# Altium PCB SHR_T.PcbDoc
Units mm, origin at the board's own origin, x right, y up, seen from the top; angles counter-clockwise.
Board outline 80.41 x 22.74 mm, 4 copper layers (Top Layer, GND, VCC, Bottom Layer), stack 0.755 mm thick; 50 components, 32 nets, 202 pads, 43 vias.
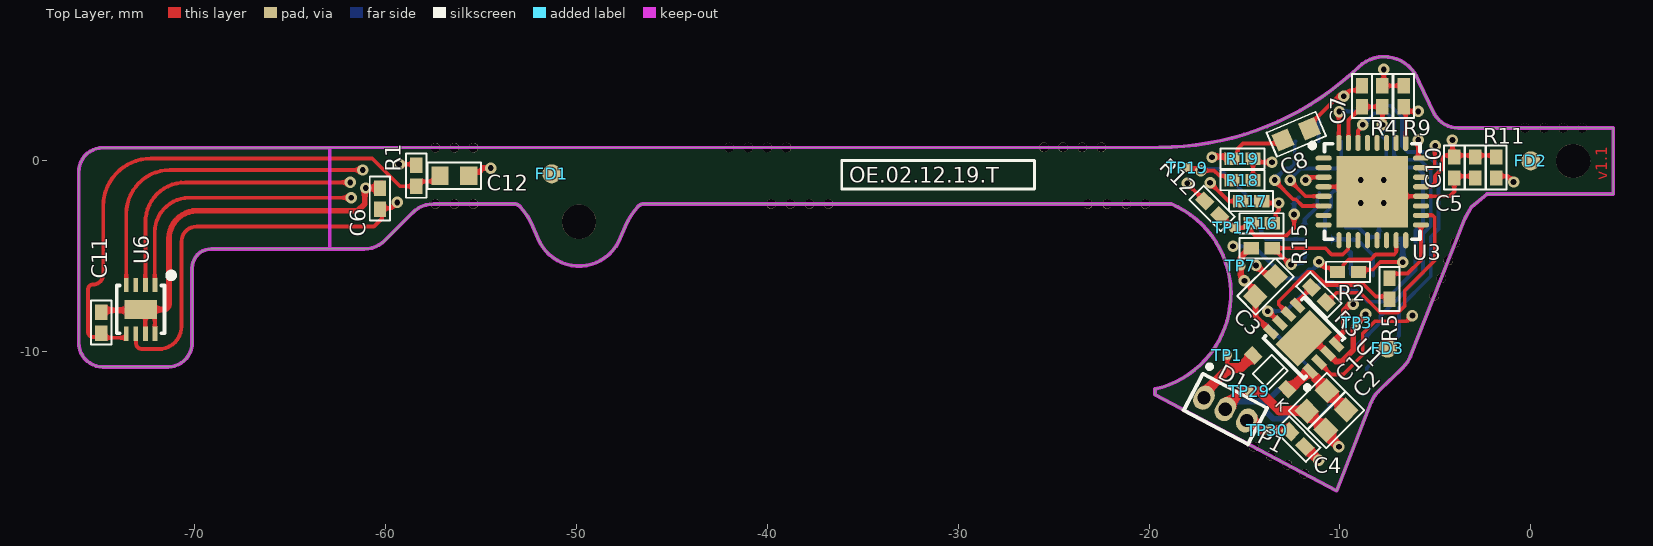
[diagram p0: Top Layer view]
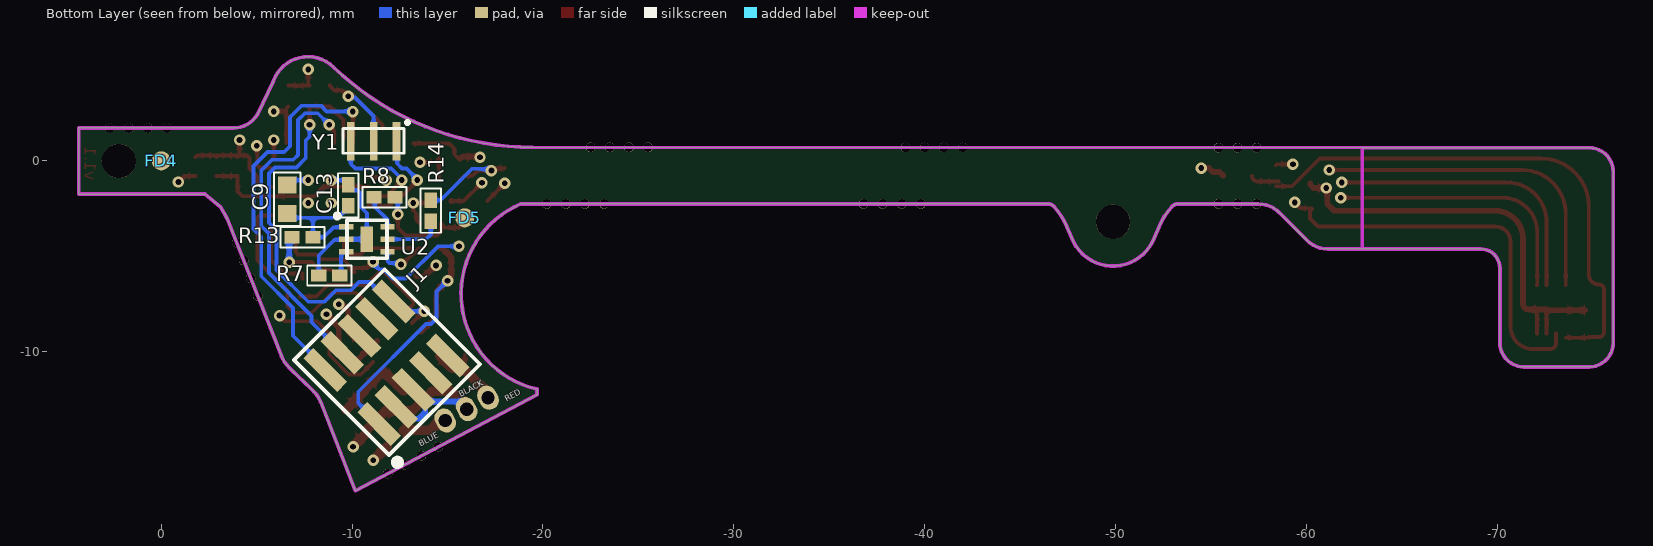
[diagram p1: Bottom Layer view, seen from below]
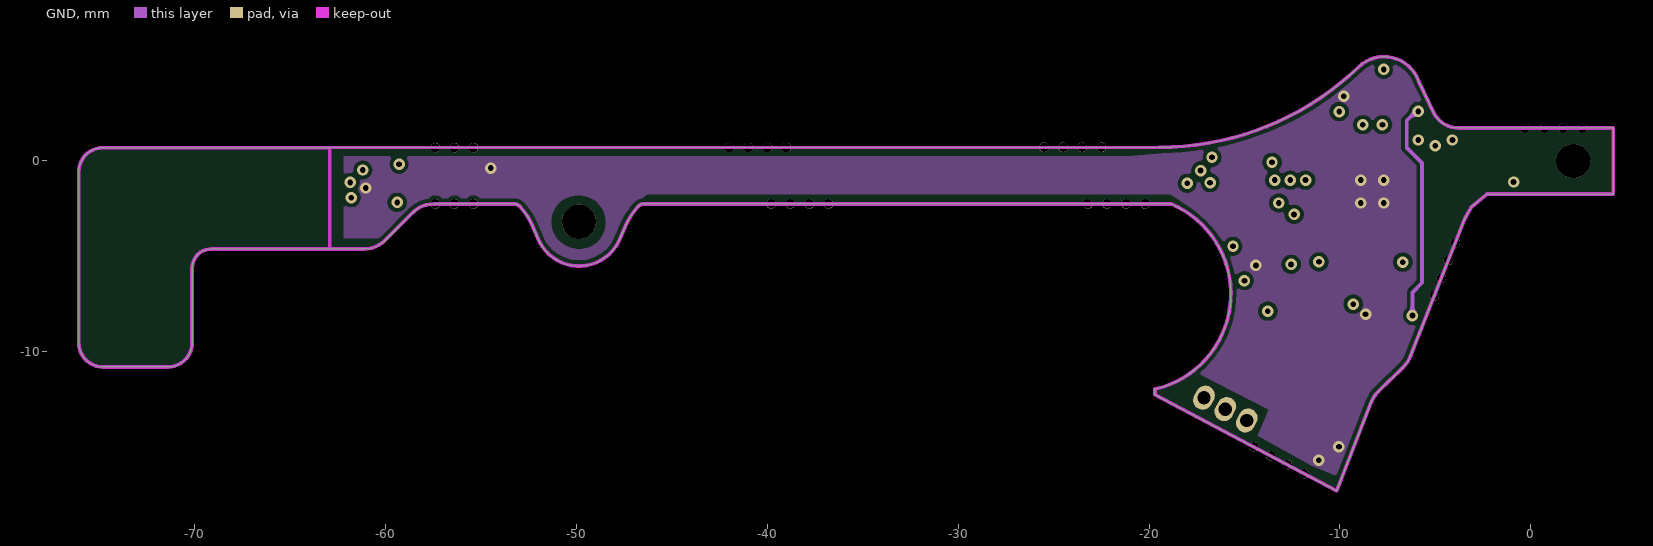
[diagram p2: GND]
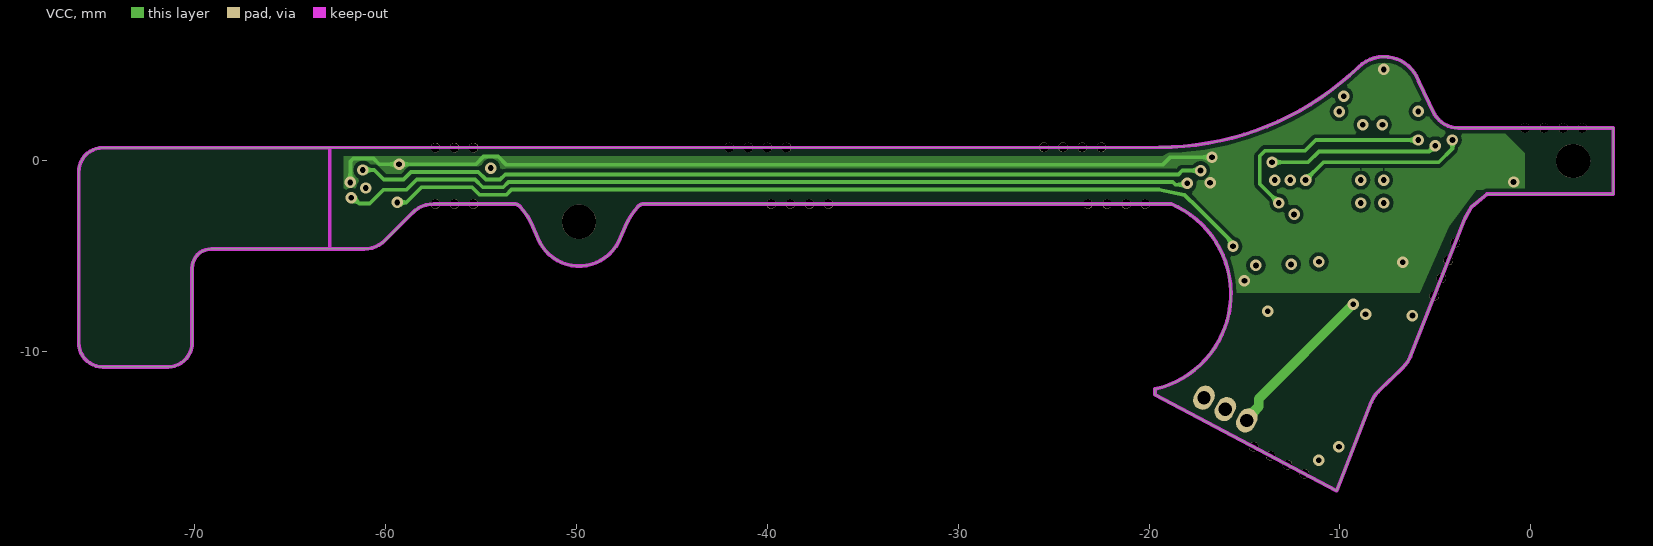
[diagram p3: VCC]
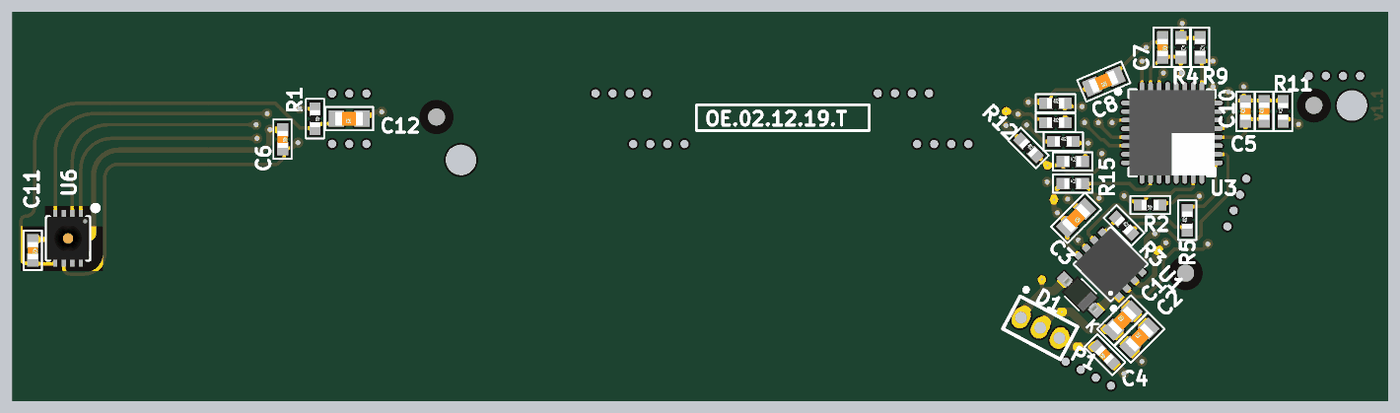
[diagram p4: 3D render of the assembled board from above, using the file's embedded part models]
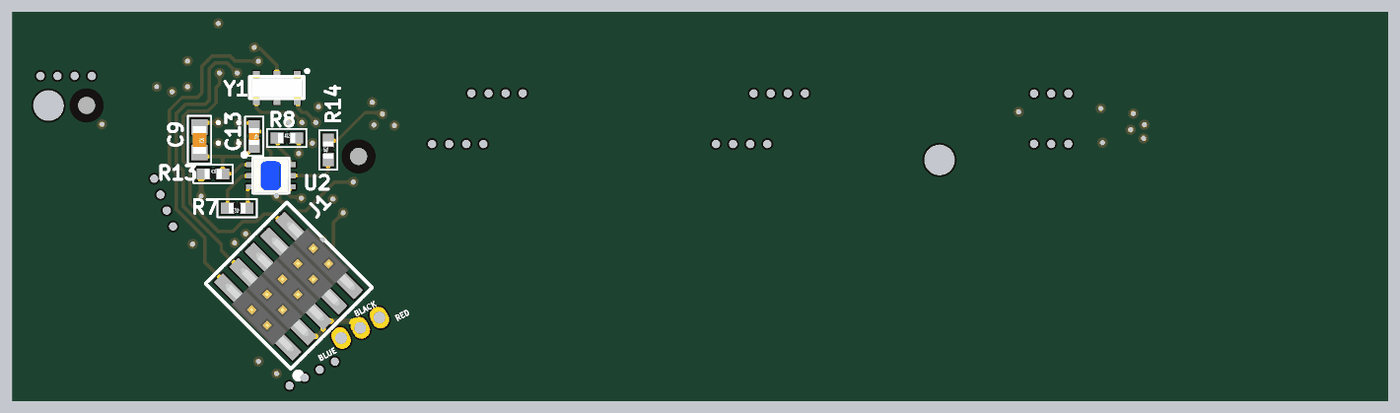
[diagram p5: 3D render of the assembled board from below, using the file's embedded part models]

## Layer stack, top to bottom
Top Solder: solder mask 0.0102, Solder Resist, Dk 3.5
Top Layer: signal copper 0.042
Polymide: prepreg 0.05, PP-006, Dk 4.1
1 pp 1080: prepreg 0.0651, PP-006, Dk 4.1
GND: signal copper 0.035
Laminate: dielectric 0.356, FR-4, Dk 4.8
VCC: signal copper 0.035
2 pp 1080: prepreg 0.13, PP-006, Dk 4.1
Bottom Layer: signal copper 0.042
Bottom Solder: solder mask 0.0102, Solder Resist, Dk 3.5

## Board outline
-76.086,-9.527 ccw(c-74.816,-9.527) -74.816,-10.797 -71.412,-10.797 ccw(c-71.412,-9.527) -70.142,-9.527 -70.142,-5.618 cw(c-69.142,-5.618) -69.142,-4.618 -61.132,-4.618 ccw(c-61.132,-3.051) -60.02,-4.155 -58.594,-2.72 cw(c-57.482,-3.825) -57.482,-2.258 -53.252,-2.258 cw(c-53.259,-2.649) -52.96,-2.396 -52.773,-2.617 cw(c-55.886,-4.997) -52.291,-3.438 -52.032,-4.036 ccw(c-49.869,-3.192) -47.706,-4.036 -47.447,-3.438 cw(c-43.852,-4.997) -46.965,-2.617 -46.778,-2.396 cw(c-46.479,-2.649) -46.486,-2.258 -18.838,-2.258 cw(c-20.828,-6.971) -19.693,-11.959 -19.693,-12.259 -10.168,-17.28 -8.349,-12.63 cw(c-6.89,-13.201) -7.985,-12.081 -6.668,-10.792 ccw(c-7.764,-9.672) -6.306,-10.248 -3.457,-3.033 -3.103,-2.408 -2.283,-1.739 4.327,-1.739 4.327,1.724 -3.787,1.724 cw(c-3.787,3.182) -5.048,2.451 -5.862,4.15 cw(c-5.508,4.319) -5.877,4.187 ccw(c-7.684,3.538) -9.016,4.921 cw(c-19.46,15.77) -19.452,0.711 -62.929,0.688 -74.816,0.688 ccw(c-74.816,-0.582) -76.086,-0.582
board region "Layer Stack Region 1": -62.9,-4.618 -69.142,-4.618 -69.24,-4.623 -69.432,-4.661 -69.613,-4.736 -69.776,-4.845 -69.915,-4.984 -70.024,-5.147 -70.099,-5.328 -70.137,-5.52 -70.142,-5.618 -70.142,-9.527 -70.142,-9.652 -70.191,-9.898 -70.286,-10.129 -70.425,-10.337 -70.602,-10.514 -70.81,-10.653 -71.041,-10.748 -71.287,-10.797 -71.412,-10.797 -74.816,-10.797 -74.941,-10.797 -75.186,-10.748 -75.418,-10.653 -75.626,-10.514 -75.802,-10.337 -75.941,-10.129 -76.037,-9.898 -76.086,-9.652 -76.086,-9.527 -76.086,-0.582 -76.086,-0.457 -76.037,-0.212 -75.941,0.019 -75.802,0.227 -75.626,0.404 -75.418,0.543 -75.186,0.639 -74.941,0.688 -74.816,0.688 -62.929,0.688 -62.9,0.688
board region "Layer Stack Region 1": -62.9,0.688 -19.452,0.711 -18.972,0.718 -18.013,0.78 -17.06,0.903 -16.116,1.086 -15.187,1.33 -14.274,1.632 -13.383,1.991 -12.517,2.407 -11.679,2.877 -10.872,3.399 -10.101,3.972 -9.367,4.593 -9.016,4.921 -8.901,5.032 -8.637,5.212 -8.347,5.347 -8.039,5.431 -7.721,5.464 -7.402,5.444 -7.091,5.371 -6.796,5.248 -6.526,5.078 -6.287,4.865 -6.087,4.616 -5.931,4.337 -5.877,4.187 -5.872,4.173 -5.864,4.155 -5.048,2.451 -4.942,2.293 -4.673,2.024 -4.344,1.835 -3.977,1.736 -3.787,1.724 4.327,1.724 4.327,-1.74 -2.283,-1.74 -3.103,-2.408 -3.457,-3.033 -6.306,-10.248 -6.337,-10.324 -6.413,-10.471 -6.504,-10.608 -6.609,-10.735 -6.668,-10.793 -7.985,-12.081 -8.043,-12.14 -8.149,-12.268 -8.24,-12.406 -8.317,-12.554 -8.349,-12.63 -10.168,-17.28 -19.693,-12.259 -19.693,-11.959 -19.381,-11.878 -18.776,-11.658 -18.204,-11.363 -17.673,-10.998 -17.192,-10.57 -16.769,-10.085 -16.41,-9.551 -16.121,-8.976 -15.906,-8.369 -15.77,-7.74 -15.713,-7.098 -15.738,-6.455 -15.843,-5.82 -16.027,-5.203 -16.287,-4.614 -16.619,-4.062 -17.017,-3.557 -17.476,-3.105 -17.988,-2.715 -18.545,-2.392 -18.838,-2.258 -46.486,-2.258 -46.528,-2.261 -46.609,-2.28 -46.684,-2.315 -46.75,-2.366 -46.778,-2.396 -46.965,-2.617 -47.036,-2.713 -47.169,-2.911 -47.29,-3.117 -47.398,-3.33 -47.447,-3.438 -47.706,-4.036 -47.791,-4.253 -48.042,-4.644 -48.367,-4.978 -48.751,-5.24 -49.18,-5.421 -49.636,-5.514 -50.102,-5.514 -50.558,-5.421 -50.987,-5.24 -51.371,-4.978 -51.695,-4.644 -51.947,-4.253 -52.032,-4.036 -52.291,-3.438 -52.34,-3.33 -52.448,-3.117 -52.569,-2.911 -52.702,-2.713 -52.773,-2.617 -52.96,-2.396 -52.988,-2.366 -53.054,-2.315 -53.129,-2.28 -53.21,-2.261 -53.252,-2.258 -57.482,-2.258 -57.637,-2.265 -57.939,-2.326 -58.224,-2.444 -58.48,-2.616 -58.594,-2.72 -60.02,-4.155 -60.129,-4.265 -60.387,-4.438 -60.673,-4.557 -60.977,-4.618 -61.132,-4.618 -62.9,-4.618

## Design rules (kind name [scope] priority, off if disabled: settings)
Clearance [All] p1: gap=0.2 ignorepadtopadclearanceinfootprint=FALSE
MinimumSolderMaskSliver [All] p1: minsoldermaskwidth=0.07
PolygonConnect [All] p1: thpad.connectstyle=Relief thpad.reliefconductorwidth=0.254 thpad.reliefentries=4 thpad.polygonreliefangle="90 Angle" thpad.airgapwidth=0.254 smdpad.connectstyle=Relief smdpad.reliefconductorwidth=0.254 smdpad.reliefentries=4 smdpad.polygonreliefangle="90 Angle" smdpad.airgapwidth=0.254 via.connectstyle=Direct via.reliefconductorwidth=0.254 via.reliefentries=4 via.polygonreliefangle="90 Angle" via.airgapwidth=0.254
RoutingVias [All] p1: holewidth=0.711 width=1.27 viastyle="Through Hole" minholewidth=0.711 minwidth=1.27 maxholewidth=0.711 maxwidth=1.27
SolderMaskExpansion [All] p1: expansion=0.102
Width [All] p1: maxlimit=5 minlimit=0.2 preferedwidth=0.2
29 further rules are at their usual default settings.

## Classes and differential pairs
component class SHR_T: C1 C2 C3 C4 C5 C6 C7 C8 C9 C10 C11 C12 C13 D1 J1 P1 R1 R2 R3 R4 R5 R7 R8 R9 R11 R12 R13 R14 R15 R16 R17 R18 R19 TP1 TP3 TP7 TP17 TP19 TP29 TP30 U1 U2 U3 U6 Y1 z_PCB1

## Components (designator, comment, footprint, x,y, rotation, side; value= is the part's Value field where it differs from the comment)
C1 "Capacitor" 0603_CAP -11.2,-12.579 r45 top value=2.2uF
C2 "Capacitor" 0603_CAP -10.2,-13.579 r45 top value=100nF
C3 "Capacitor" 0603_CAP -13.9,-6.579 r225 top value=1uF
C4 "Capacitor" 0402_CAP -12.223,-14.579 r135 top value=180pF
C5 "Capacitor" 0402_CAP -2.9,-0.35 r90 top value=100nF
C6 "Capacitor" 0402_CAP -60.3,-1.979 r270 top value=100nF
C7 "Capacitor" 0402_CAP -8.842,3.392 r270 top value=100nF
C8 "Capacitor" 0603_CAP -12.284,1.392 r203 top value=1uF
C9 "Capacitor" 0603_CAP -6.6,-2.008 r270 bottom value=1uF
C10 "Capacitor" 0402_CAP -4,-0.35 r90 top value=1uF
C11 "Capacitor" 0402_CAP -74.9,-8.479 r270 top value=100nF
C12 "Capacitor" 0603_CAP -56.4,-0.779 r180 top value=1uF
C13 "Capacitor" 0402_CAP -9.8,-1.808 r270 bottom value=100nF
D1 "Diode" "SOD323 (REFLOW-DIODE_V2) NXP" -13.649,-11.078 r315 top
FD1 "Comment" Fiducial -51.3,-0.679 r0 top
FD2 "Comment" Fiducial 0,0 r0 top
FD3 "Comment" Fiducial -7.5,-9.808 r0 top
FD4 "Comment" Fiducial 0,0 r180 bottom
FD5 "Comment" Fiducial -15.9,-2.984 r180 bottom
J1 "Conn SWD" CON_10P_HARWIN_M50-3600542 -11.8,-10.579 r135 bottom
P1 "Huella para 3 cables" CON_TH_3P_1.27MM -16,-13.008 r332 top
R1 "Resistor" 0402_RES -58.4,-0.779 r270 top value=0
R2 "Resistor" 0402_RES -9.574,-5.822 r180 top value=4K7
R3 "Resistor" 0402_RES -11.1,-7.023 r315 top value=33
R4 "Resistor" 0402_RES -7.771,3.392 r270 top value=10K
R5 "Resistor" 0402_RES -7.4,-6.708 r90 top value=33
R7 "Resistor" 0402_RES -8.8,-6.008 r0 bottom value=49.9K
R8 "Resistor" 0402_RES -11.7,-1.908 r180 bottom value=0
R9 "Resistor" 0402_RES -6.651,3.392 r270 top value=4K7
R11 "Resistor" 0402_RES -1.8,-0.35 r90 top value=0
R12 "Resistor" 0402_RES -16.689,-2.49 r315 top value=33
R13 "Resistor" 0402_RES -7.4,-4.008 r180 bottom value=0
R14 "Resistor" 0402_RES -14.127,-2.609 r90 bottom value=0
R15 "Resistor" 0402_RES -14.1,-4.579 r0 top value=4K7
R16 "Resistor" 0402_RES -14.1,-3.279 r0 top value=33
R17 "Resistor" 0402_RES -14.65,-2.108 r0 top value=4K7
R18 "Resistor" 0402_RES -15.1,-1.008 r0 top value=33
R19 "Resistor" 0402_RES -15.1,0.121 r0 top value=4K7
TP1 "TP de Produccion" TP_0.5 -15.9,-10.179 r90 top
TP3 "TP de Produccion" TP_0.5 -9.1,-8.479 r90 top
TP7 "TP de Produccion" TP_0.5 -15.2,-5.508 r90 top
TP17 "TP de Produccion" TP_0.5 -15.575,-3.515 r90 top
TP19 "TP de Produccion" TP_0.5 -18,-0.348 r90 top
TP29 "TP de Produccion" TP_0.5 -14.741,-12.081 r90 top
TP30 "TP de Produccion" TP_0.5 -13.8,-14.109 r90 top
U1 "NCV7428MW3R2G" "DFN 8 (3X3)" -11.887,-9.292 r45 top
U2 "Sensor de luminosidad" "ODFN 6 LD (2.1X2MM)" -10.774,-4.108 r180 bottom locked
U3 "Micro" "HVQFN-32 (5X5MM)" -8.3,-1.608 r0 top
U6 "SHT31-DIS-B" "DFN8 (SHT31-DIS-B)" -72.842,-7.779 r270 top
Y1 "XTAL" XTAL_CSTCE8M00G55A-R0 -11.124,1.027 r180 bottom

## Footprints (in the part's own frame and the unit in brackets; to place one, negate y for a bottom-side part, rotate by r counter-clockwise, add the part's x,y. Pads: shape width x height; smd on the part's side, far side on the other; paste and mask are expansions set on the pad)
0402_CAP [mm]
  rect 0.8x0.65 smd: 1(-0.55,0) 2(0.55,0)
  silkscreen extent -1.16,-0.53 1.15,0.53, body extent -0.49,-0.3 0.51,0.3, height 0.2
0402_RES [mm]
  rect 0.8x0.65 smd: 1(-0.55,0) 2(0.55,0)
  silkscreen extent -1.16,-0.53 1.15,0.53, body extent -0.5,-0.3 0.5,0.3, height 0.2
0603_CAP [mm]
  rect 0.9x0.95 smd: 1(-0.75,0) 2(0.75,0)
  silkscreen extent -1.4,-0.69 1.4,0.69, body extent -0.79,-0.4 0.81,0.4, height 0.3
CON_10P_HARWIN_M50-3600542 [mm]
  rect 0.75x2.5 smd: 1(-2.54,-2) 2(-2.54,2) 3(-1.27,-2) 4(-1.27,2) 5(0,-2) 6(0,2) 7(1.27,-2) 8(1.27,2) 9(2.54,-2) 10(2.54,2)
  silkscreen extent -3.38,-4.19 3.4,3.53, body extent -3.12,-2.85 3.23,2.65, height 4.65
CON_TH_3P_1.27MM [mm]
  oval 1x1.3 hole 0.7: 1(-1.27,0) 2(0,0) 3(1.27,0)
  silkscreen extent -1.9,-1.08 1.9,1.65
"DFN8 (SHT31-DIS-B)" [mm]
  rect 1x1.7 smd: 0(0,0)
  rect 0.75x0.25 smd: 1(-1.275,0.75) 2(-1.275,0.25) 3(-1.275,-0.25) 4(-1.275,-0.75) 5(1.275,-0.75) 6(1.275,-0.25) 7(1.275,0.25) 8(1.275,0.75)
  silkscreen extent -1.88,-1.25 1.25,1.7, body extent -1.26,-1.25 1.26,1.25, height 0.9
"DFN 8 (3X3)" [mm]
  rect 0.5x0.3 on Top Paste: 0(-0.8,0.584) 0(-0.8,-0.584) 0(-0.8,0) 0(0,0.584) 0(0,0) 0(0,-0.584) 0(0.8,0) 0(0.8,0.584) 0(0.8,-0.584)
  rect 2.55x1.65 smd paste-2: 0(0,0)
  rect 0.4x0.8 smd: 1(-0.975,-1.45) 2(-0.325,-1.45) 3(0.325,-1.45) 4(0.975,-1.45) 5(0.975,1.45) 6(0.325,1.45) 7(-0.325,1.45) 8(-0.975,1.45)
  silkscreen extent -1.78,-2.03 1.5,1.5, body extent -1.49,-1.5 1.5,1.5, height 0.9
Fiducial [mm]
  round 1 smd mask+0.5: 0(0,0)
  Top Layer pour cut-out: 0.023,1.118 0.455,1.032 0.821,0.788 1.065,0.422 1.151,-0.01 1.151,-0.01 1.065,-0.443 0.819,-0.81 0.452,-1.056 0.019,-1.142 0.019,-1.142 -0.018,-1.142 -0.44,-1.058 -0.799,-0.819 -1.038,-0.46 -1.122,-0.038 -1.122,-0.038 -1.122,0.027 -1.039,0.445 -0.802,0.798 -0.449,1.035 -0.031,1.118 -0.031,1.118 -0.031,1.127 0.023,1.127
"HVQFN-32 (5X5MM)" [mm]
  round 0.6 on Top Paste: 0(-1.2,-1.2) 0(-1.2,0) 0(-1.2,1.2) 0(0,-1.2) 0(0,0) 0(0,1.2) 0(1.2,-1.2) 0(1.2,0) 0(1.2,1.2)
  rect 3.75x3.75 smd paste-5: 0(0,0)
  oval 0.85x0.27 smd: 1(-2.55,1.75) 2(-2.55,1.25) 3(-2.55,0.75) 4(-2.55,0.25) 5(-2.55,-0.25) 6(-2.55,-0.75) 7(-2.55,-1.25) 8(-2.55,-1.75) 17(2.55,-1.75) 18(2.55,-1.25) 19(2.55,-0.75) 20(2.55,-0.25) 21(2.55,0.25) 22(2.55,0.75) 23(2.55,1.25) 24(2.55,1.75)
  oval 0.27x0.85 smd: 9(-1.75,-2.55) 10(-1.25,-2.55) 11(-0.75,-2.55) 12(-0.25,-2.55) 13(0.25,-2.55) 14(0.75,-2.55) 15(1.25,-2.55) 16(1.75,-2.55) 25(1.75,2.55) 26(1.25,2.55) 27(0.75,2.55) 28(0.25,2.55) 29(-0.25,2.55) 30(-0.75,2.55) 31(-1.25,2.55) 32(-1.75,2.55)
  silkscreen extent -3.23,-2.5 2.5,2.5, body extent -2.5,-2.5 2.5,2.5, height 0.99
"ODFN 6 LD (2.1X2MM)" [mm]
  rect 0.65x1.35 smd paste+0: 0(0,0)
  rect 0.75x0.3 smd: 1(-1.075,0.65) 2(-1.075,0) 3(-1.075,-0.65) 4(1.075,-0.65) 5(1.075,0) 6(1.075,0.65)
  silkscreen extent -1.66,-1 1.05,1.33, body extent -1.05,-1 1.05,1, height 0.8
"SOD323 (REFLOW-DIODE_V2) NXP" [mm]
  rect 0.8x0.6 smd: A(-1.25,0) K(1.25,0)
  silkscreen extent -0.59,-0.7 0.59,0.7, body extent -1.3,-0.67 1.3,0.67, height 1.1
TP_0.5 [mm]
  round 0.5 smd paste-0.191 mask+0.051: 0(0,0)
XTAL_CSTCE8M00G55A-R0 [mm]
  rect 0.4x2 smd mask+0.07: 1(1.2,0) 2(0,0) 3(-1.2,0)
  silkscreen extent -1.6,-0.63 1.83,1.04, body extent -1.6,-0.65 1.6,0.65, height 0.7

## Part data
C1: library part "Cap Semi", "AEC Condensador", Package=0603, Tolerance=10%, Voltage=50V, Cod. Fab=GRT188R61H225KE13, Fabricante=Murata, Material=X5R
C2: library part "Cap Semi", "AEC Flexiterm", Package=0603, Tolerance=10%, Voltage=50V, Cod. Fab=06035C104K4Z2A, Fabricante=AVX, Material="X7R Flexiterm"
C3 C8 C9 C12: library part Cap, "AEC Condensador", Package=0603, Tolerance=10%, Voltage=25V, Cod. Fab=GCM188R71E105KA64, Fabricante=Murata, Material=X7R
C4: library part Cap, "AEC Condensador", Package=0402, Tolerance=10%, Voltage=50V, Cod. Fab=C0402C181K5RACAUTO, Fabricante=KEMET, Material=X7R
C5 C13: library part "Cap Semi", "AEC Condensador", Package=0402, Tolerance=10%, Voltage=50V, Cod. Fab=GCM155R71C104KA55D, Fabricante=Murata, Material=X7R
C6 C7 C11: library part Cap, "AEC Condensador", Package=0402, Tolerance=10%, Voltage=16V, Cod. Fab=GCM155R71C104KA55D, Fabricante=MURATA, Material=X7R
C10: library part Cap, "AEC Condensador", Package=0402, Tolerance=10%, Voltage=25V, Cod. Fab=GRT155R61E105KE01, Fabricante=Murata, Material=X5R
D1: "AEC Diodo", Current=625mA, Package=SOD323, Supplier Part Number 1=78-BAV21WS-E3-18, Voltage=200Vr, Cod. Fab=BAV21WS-E3-18, Datasheet=https://www.vishay.com/docs/85726/bav19ws.pdf, Fabricante=Vishay, Supplier 1=Mouser
J1: "CONECTOR, MACHO, SMT, R/A, 1,27 MM, 10P", Supplier Part Number 1=1022310, Temperature="-55ºC - 105ºC", Voltage=600V, Cod. Fab=M50-3600542, Datasheet=http://www.harwin.com/include/downloads/drawings/M50-360.PDF, Fabricante=HARWIN, Supplier 1=Farnell
P1: library part "Header 3", "Huellas para soldar cable de 24-18AWG"
R1 R8 R11 R13 R14: library part RES_Dup2, "AEC", Package=0402, Power=1/16W, Tolerance=5%, Cod. Fab=AC0402JR-070RL, Fabricante=Yageo
R2 R3 R5 R9 R12 R15 R16 R17 R18 R19: library part RES_Dup2, "AEC", Package=0402, Power=1/16w, Tolerance=0.5%, Fabricante=Yageo
  R2 R9 R15 R17 R19: Cod. Fab=AC0402DR-074K7L
  R3 R5 R12 R16 R18: Cod. Fab=AC0402DR-0733RL
R4 R7: library part RES_Dup2, "AEC", Package=0402, Power=1/16W, Tolerance=1%, Fabricante=Yageo
  R4: Cod. Fab=AC0402FR-0710KL
  R7: Cod. Fab=AC0402FR-0749K9L
U1: "AEC-Q100 Lin transceiver and voltage regulator", Current=70mA, Package="DFN-8 (3x3)", Supplier Part Number 1=863-NCV7428MW3R2G, Cod. Fab=NCV7428MW3R2G, Datasheet=https://www.onsemi.com/pub/Collateral/NCV7428-D.PDF, Fabricante=OnSemiconductor, Supplier 1=Mouser
U2: library part ISL76683, "AEC-Q100", Package="6 Ld ODFN (2.1x2)", Supplier Part Number 1=968-ISL76683AROZ-T7, Temperature="-40 to 105", Voltage=3V3, Cod. Fab=ISL76683AROZ-T7, Datasheet=https://www.renesas.com/eu/en/www/doc/datasheet/isl76683.pdf, Fabricante=Renesas, Supplier 1=Mouser
U3: library part S32K116_32QFN_Tesla, "AEC - Micro ARM 32qfn, Flash 128K", Package=32-HVQFN, Supplier Part Number 1=771-FS32K116LAT0MFMT, Temperature="-40 - 125C", Voltage="2.7 - 5.5V", Cod. Fab=FS32K116LAT0MFMT, Fabricante=NXP, Supplier 1=Mouser
U6: "Sensor de humedad", Package=DFN8, Supplier Part Number 1=403-SHT31-DIS-B, Cod. Fab=SHT31-DIS-B, Datasheet=https://www.sensirion.com/fileadmin/user_upload/customers/sensirion/Dokumente/0_Datasheets/Humidity/Sensirion_Humidity_Sensors_SHT3x_Datasheet_digital.pdf, Fabricante=Sensirion, Supplier 1=Mouser
Y1: "Crystal Oscillator", Frequency=8MHz, Package=smd, Supplier Part Number 1=2443269, Temperature="-40ºC -  125ºC", Cod. Fab=CSTCE8M00G55A-R0, ComponentLink1Description=http://www.farnell.com/datasheets/45562.pdf, ComponentLink1URL=http://www.farnell.com/datasheets/45562.pdf, Fabricante=MURATA, Supplier 1=Farnell

## Free pads (board coordinates)
  round 0.5 hole 0.5 unplated: 0(-57.4,-2.252) 0(-57.4,0.692) 0(-56.4,-2.252) 0(-56.4,0.692) 0(-55.4,-2.252) 0(-55.4,0.692) 0(-42,0.699) 0(-41,0.699) 0(-40,0.699) 0(-39.8,-2.259) 0(-39,0.699) 0(-38.8,-2.259) 0(-37.8,-2.259) 0(-36.8,-2.259) 0(-25.5,0.708) 0(-24.5,0.708) 0(-23.5,0.708) 0(-23.2,-2.259) 0(-22.5,0.708) 0(-22.2,-2.259) 0(-21.2,-2.259) 0(-20.2,-2.259) 0(-14.514,-14.985) 0(-13.631,-15.454) 0(-12.748,-15.923) 0(-11.865,-16.393) 0(-5.055,-7.079) 0(-4.688,-6.149) 0(-4.32,-5.219) 0(-3.953,-4.289) 0(-0.3,1.723) 0(0.7,1.723) 0(1.7,1.723) 0(2.7,1.723)
  round 1.8 hole 1.8 unplated: 0(-49.869,-3.192) 0(2.226,-0.008)

## Via types
v1: diameter 0.6, hole 0.3, Top Layer to Bottom Layer, tented both sides, 43 vias

## Nets (pads, with @x,y where several pads share a name; then routed paths per layer and width w, separated by ;. In a path a pad name is that pad's centre, name@x,y a point inside that pad or via, vN(x,y) a via of type N, cw(c..) or ccw(c..) an arc to the next point about the centre after c; other vN are vias at no path point)
3V3: C3.2 C8.2 J1.1 R1.1 R2.1 R4.1 R9.1 R11.1 R13.1 R15.1 R17.1 R19.1 TP7.0 U1.8 U6.2 | length 91.6
  Top Layer w0.2: U6.2 -72.592,-3.221 cw(c-70.5,-3.221) -70.5,-1.129 v1(-61.85,-1.129) ; v1(-59.3,-0.179) -58.45,-0.179 R1.1 ; v1@-16.8,-1.15 -15.842,-2.108 R17.1 ; R19.1 -15.575,0.121 -15.35,0.346 -15.35,0.639 -15.075,0.915 C8.2@-13.204,0.915 ; R2.1 -8.91,-5.708 -8.281,-5.708 -7.881,-5.308 v1(-6.7,-5.308) ; v1(-7.7,4.792) -7.7,4.013 R4.1 R9.1 ; R11.1@-1.8,-0.8 -1.217,-0.8 -0.909,-1.108 v1(-0.9,-1.108)
  Top Layer w0.3: v1(-16.7,0.184) -16.655,0.229 -15.911,0.229 cw(c-15.911,-0.14) R19.1 ; R15.1 -14.725,-4.579 -15.2,-5.054 TP7.0 -15.2,-6.079 v1(-15,-6.279) -14.97,-6.279 -14.43,-6.819 C3.2 -14.413,-7.127 -14.413,-7.551 -14.425,-7.564 -14.425,-8.148 -13.617,-8.956 U1.8
  VCC w0.2: v1(-61.85,-1.129) -61.85,-0.029 -61.7,0.121 -60.634,0.121 -60.334,-0.179 v1(-59.3,-0.179) -55.271,-0.179 -54.871,0.221 -54.1,0.221 -53.671,-0.208 -19.295,-0.208 -18.902,0.184 v1(-16.7,0.184)
  Bottom Layer w0.2: v1(-15,-6.279) -14.425,-6.854 -14.425,-8.254 -14.127,-8.552 -13.869,-8.552 -10.322,-12.099 -10.322,-12.693 J1.1
  Bottom Layer w0.3: R13.1@-7,-4.108 -6.717,-4.108 -6.7,-4.125 v1(-6.7,-5.308)
  other v1: -16.8,-1.144
BLACK: C1.1 C2.1 C3.1 C4.1 C5.1 C6.1 C7.1 C8.1 C9.1 C10.1 C11.1 C12.1 C13.1 J1.3 J1.5 P1.2 R7.2 TP3.0 TP29.0 U1.0@-11.887,-9.292 U1.3 U2.0 U2.2 U3.0@-8.3,-1.608 U3.4 U3.20 U6.0 U6.7 U6.8 Y1.2 | length 69.4
  Top Layer w0.2: U6.7 U6.0@-72.592,-8.029 ; U6.8 U6.0@-72.092,-8.029 ; C8.1 -11.594,1.876 -10.078,3.392 -9.853,3.392 v1@-9.777,3.315 ; U3.4 U3.0@-8.55,-1.358 ; v1(-9.8,3.392) -9.783,3.392 -9.483,3.692 -9.067,3.692 -8.842,3.917 C7.1 ; U3.0@-8.3,-1.608 -8.05,-1.858 U3.20 -4.25,-1.858 -4,-1.608 C10.1 -4,-0.8 C5.1@-2.9,-0.8
  Top Layer w0.3: C11.1@-74.6,-7.829 -72.763,-7.829 cw(c-72.763,-7.992) U6.0@-72.6,-7.992 ; U6.0@-72.6,-7.792 -71.663,-7.792 ccw(c-71.663,-7.479) -71.35,-7.479 -71.35,-4.067 cw(c-69.9,-4.067) -69.9,-2.617 -61.459,-2.617 -61.1,-2.258 -61.1,-1.479 v1(-61.043,-1.422) -60.375,-1.422 -60.2,-1.247 C6.1@-60.2,-1.179 ; C12.1 -55.45,-0.579 -55.1,-0.579 -54.9,-0.379 v1(-54.5,-0.379) ; v1(-14.4,-5.479) -14.364,-5.479 -13.794,-6.049 C3.1 ; C1.1@-11.748,-13.092 C1.1 C1.1@-11.73,-13.138 ; U1.0@-11.3,-9.445 -10.658,-10.088 U1.3 ; C2.1@-10.759,-14.109 C2.1 C2.1@-10.73,-14.295 ; U1.3@-10.561,-10.088 U1.3 ; v1(-8.654,-8.037) -8.656,-8.037 -9.098,-8.479 TP3.0 -9.1,-8.533 -9.3,-8.733 -9.3,-9.909 -9.899,-10.508 -10.211,-10.508 U1.3 ; U3.0@-8.55,-1.358 U3.0@-8.3,-1.608
  Top Layer w0.5: P1.2@-16.111,-13.008 -15.184,-12.081 TP29.0 -14.18,-12.081 -13.169,-13.092 C1.1@-11.748,-13.092 ; C4.1 v1(-11.112,-15.69) ; C1.1@-11.73,-13.138 C2.1@-10.759,-14.109 ; C2.1@-10.73,-14.295 v1(-10.052,-14.974)
  Bottom Layer w0.2: Y1.2 -11.124,2.346 -10.155,3.315 -9.877,3.315 v1(-9.8,3.392) ; U2.0 -10.774,-2.744 -10.45,-2.42 -10.45,-1.714 -10.272,-1.536 -10.025,-1.536 -9.8,-1.311 C13.1 -9.8,-1.233 -9.575,-1.008 v1(-8.9,-1.008) ; U2.2@-9.674,-4.133 -9.075,-4.133 -8.25,-4.958 R7.2 ; v1(-7.7,-1.008) C9.1@-6.849,-1.008
  Bottom Layer w0.25: U2.0 U2.2 U2.2@-9.674,-4.133
  Bottom Layer w0.3: P1.2@-16.121,-13.083 -15.651,-12.612 J1.5@-13.833,-12.612 ; J1.5 J1.5@-13.833,-12.612 ; J1.3 -12.935,-13.51 -13.493,-13.51 -13.833,-13.17 J1.5@-13.833,-12.612
  other v1: -8.9,-2.208 -7.7,-2.208
BLUE: C4.2 P1.3 TP30.0 U1.4 | length 13.2
  Top Layer w0.3: C4.2@-12.692,-14.109 C4.2 ; U1.4@-10.272,-9.407 -9.8,-8.935 -9.8,-7.837 -9.47,-7.508 v1(-9.3,-7.508)
  Top Layer w0.5: P1.3@-14.65,-13.57 -14.111,-14.109 TP30.0 C4.2@-12.692,-14.109
  VCC w0.3: P1.3@-15,-13.679 P1.3@-15,-13.617
  VCC w0.5: P1.3@-15,-13.617 -14.262,-12.879 -14.262,-12.47 v1(-9.3,-7.508)
NetC1_2: C1.2 C2.2 D1.K U1.1 | length 4.4
  Top Layer w0.5: D1.K@-12.813,-11.99 -12.748,-12.056 -12.677,-12.056 U1.1@-11.625,-11.004 ; U1.1@-11.551,-11.078 -10.67,-11.959 C1.2 C2.2
NetC5_2: C5.2 C10.2 R11.2 U3.3 U3.21 | length 16.4
  Top Layer w0.2: v1(-11.8,-1.008) -11.725,-1.008 -11.575,-0.858 U3.3 ; U3.21 -5.234,-1.358 -5.023,-1.147 -5.023,-0.802 -4.625,-0.404 -4.625,0.165 -4.508,0.282 C10.2@-4.082,0.282 ; C10.2 C10.2@-4.082,0.282 ; v1@-3.91,1.092 v1(-4.1,1.092) -4.1,0.3 C10.2@-4.082,0.282 ; C5.2 C5.2@-2.9,0.282 ; R11.2 -1.882,0.282 C5.2@-2.9,0.282 ; C10.2@-4.082,0.282 C5.2@-2.9,0.282
  VCC w0.2: v1(-11.8,-1.008) -10.866,-0.074 -4.819,-0.074 -4.101,0.644 v1@-4.101,1.091 ; v1(-4.1,1.092) -4.1,1.153 v1@-4.069,1.122
NetC6_2: C6.2 R2.2 U3.15 U6.6 | length 77.4
  Top Layer w0.2: U6.6 -73.092,-9.516 ccw(c-72.742,-9.516) -72.742,-9.866 -71.9,-9.866 ccw(c-71.9,-8.666) -70.7,-8.666 -70.7,-4.238 cw(c-69.9,-4.238) -69.9,-3.438 -60.621,-3.438 -60.2,-3.017 C6.2@-60.2,-2.479 ; C6.2 -60.25,-2.479 C6.2@-60.2,-2.479 ; v1(-59.4,-2.179) -59.7,-2.479 C6.2@-60.2,-2.479 ; v1(-11.097,-5.294) -10.783,-5.608 R2.2@-10.075,-5.608 ; R2.2 -10.049,-5.822 -9.824,-5.597 -9.824,-5.448 -9.535,-5.159 -8.375,-5.159 -8.125,-4.908 -7.167,-4.908 -7.05,-4.791 U3.15
  VCC w0.2: v1(-59.4,-2.179) -58.919,-2.179 -58.119,-1.379 -55.48,-1.379 -55.08,-1.779 -53.671,-1.779 -53.4,-1.508 -19.465,-1.508 -18.145,-1.784 -17.468,-2.453 -15.713,-4.208 cw(c-15.984,-4.479) v1(-15.6,-4.479)
  Bottom Layer w0.2: v1(-15.6,-4.479) -14.499,-4.479 -12.807,-6.172 -12.127,-6.172 -11.634,-5.679 -11.4,-5.679 v1@-11.132,-5.411
NetC7_2: C7.2 J1.10 R4.2 U1.7 U3.31 | length 23.7
  Top Layer w0.2: v1(-13.775,-7.879) -13.76,-7.879 U1.7 ; U3.31@-9.55,1.119 -9.55,2.134 C7.2 R4.2 v1(-7.771,1.892)
  Bottom Layer w0.2: v1(-13.775,-7.879) -12.84,-7.879 -11.892,-6.93 -11.503,-6.93 -10.92,-6.347 -10.366,-6.347 -9.934,-6.779 -9.152,-6.779 -8.552,-7.379 -7.7,-7.379 -6.038,-5.717 -6.038,-3.643 -5.638,-3.243 -5.638,-0.667 -5.965,-0.34 -7.082,-0.34 -7.571,0.148 -7.571,1.062 -7.771,1.262 v1(-7.771,1.892)
NetC9_2: C9.2 C13.2 R13.2 U2.1 | length 6.5
  Bottom Layer w0.2: C13.2 -9.575,-2.583 -9.575,-2.673 -9.264,-2.984 -7.95,-2.984 ; U2.1 -9.673,-3.484 -9.024,-3.484 -8.511,-3.997 R13.2@-7.95,-3.997 ; R13.2 R13.2@-7.95,-3.997 ; C9.2@-6.6,-2.984 -7.95,-2.984 ; R13.2@-7.95,-3.997 -7.95,-2.984
NetC11_2: C11.2 C12.2 R1.2 U6.5 | length 29.2
  Top Layer w0.2: C11.2@-74.8,-9.267 U6.5@-73.6,-9.267 ; C11.2@-74.8,-9.229 -75.327,-9.229 cw(c-75.327,-8.956) -75.6,-8.956 -75.6,-6.752 cw(c-75.327,-6.752) -75.327,-6.479 ccw(c-75.327,-5.952) -74.8,-5.952 -74.8,-2.369 cw(c-72.31,-2.369) -72.31,0.121 -60.701,0.121 -59.251,-1.329 R1.2 ; R1.2@-58.55,-1.079 -57.45,-1.079 ccw(c-57.45,-0.779) C12.2
NetJ1_2: J1.2 U3.32 | length 21.4
  Top Layer w0.2: v1@-10.052,2.592 -10.052,0.944 U3.32
  Bottom Layer w0.2: v1(-10.04,2.582) -10.03,2.592 -8.666,2.592 -8.366,2.892 -7.356,2.892 -6.747,2.282 -6.747,0.763 -6.443,0.46 -5.573,0.46 -4.838,-0.276 -4.838,-3.575 -5.238,-3.975 -5.238,-6.048 -6.9,-7.71 -6.9,-9.166 -8.59,-10.856 J1.2
NetJ1_4: J1.4 U3.30 | length 18.5
  Top Layer w0.2: U3.30 -9.05,1.575 -8.8,1.825 v1(-8.8,1.892)
  Bottom Layer w0.2: J1.4 -7.878,-8.453 -7.878,-8.123 -5.638,-5.882 -5.638,-3.809 -5.238,-3.409 -5.238,-0.501 -5.799,0.06 -6.916,0.06 -7.171,0.314 -7.171,2.141 -7.522,2.492 -8.2,2.492 v1(-8.8,1.892)
NetR3_1: R3.1 U1.5 | length 1.3
  Top Layer w0.2: U1.5@-12.502,-7.43 -12.284,-7.43 R3.1
NetR3_2: R3.2 U3.18 | length 11
  Top Layer w0.2: R3.2 -10.685,-7.412 -10.181,-6.908 -8.935,-6.908 -7.885,-7.958 -6.951,-7.958 -6.602,-7.609 -6.602,-6.799 -5.025,-5.222 -5.025,-2.975 -5.142,-2.858 U3.18
NetR5_1: R5.1 U1.6 | length 8
  Top Layer w0.2: U1.6 -13.199,-7.52 -13.199,-7.355 -11.666,-5.822 -11.418,-5.822 -10.731,-6.508 -8.72,-6.508 -8.119,-7.109 R5.1@-7.26,-7.109
NetR5_2: R5.2 U3.17 | length 3.9
  Top Layer w0.2: R5.2 R5.2@-7.4,-6.083 ; R5.2@-7.4,-5.908 -6.451,-5.908 -5.75,-5.207 U3.17
NetR7_1: R7.1 U2.3 | length 1.7
  Bottom Layer w0.2: U2.3 -9.474,-4.758 -9.424,-4.808 -9.424,-5.934 R7.1 R7.1@-9.16,-6.008
NetR8_1: R8.1 U2.6 | length 2.1
  Bottom Layer w0.2: U2.6 -11.849,-3.079 -11.184,-2.414 R8.1@-11.184,-1.908 ; R8.1@-11.084,-1.908 R8.1@-11.084,-1.679
NetR8_2: R8.2 R12.2 R16.1 TP17.0 | length 6.7
  Top Layer w0.2: R12.2 -16.111,-2.879 -16.111,-2.979 TP17.0 -15.564,-3.504 -14.875,-3.504 R16.1@-14.653,-3.282 ; R16.1 R16.1@-14.653,-3.282 ; v1(-12.4,-2.808) -12.4,-3.512 -12.792,-3.904 -14.456,-3.904 -14.653,-3.708 R16.1@-14.653,-3.282
  Bottom Layer w0.2: v1(-12.4,-2.808) -12.4,-2.197 -12.366,-2.163 -12.395,-2.133 -12.17,-1.908 R8.2@-12.15,-1.908
NetR9_2: R9.2 U1.2 U3.25 | length 21.3
  Top Layer w0.2: U1.2 -10.451,-11.188 -9.826,-11.188 -8.8,-10.162 -8.8,-9.042 -8.166,-8.408 -6.5,-8.408 v1(-6.2,-8.108) ; R9.2 -6.55,2.741 R9.2@-6.55,2.716 ; U3.25 R9.2@-6.55,2.716 ; v1(-5.9,2.592) -6.426,2.592 R9.2@-6.55,2.716
  GND w0.2: v1(-6.2,-8.108) -6.2,-6.889 -5.7,-6.389 -5.7,-0.108 -6.5,0.692 -6.5,2.1 -6.008,2.592 v1(-5.9,2.592)
NetR12_1: R12.1 U6.1 | length 60.2
  Top Layer w0.2: U6.1 -72.1,-6.504 -72.1,-3.737 cw(c-70.294,-3.737) -70.294,-1.931 v1(-61.8,-1.931) ; v1(-18,-1.179) R12.1
  VCC w0.2: v1@-61.692,-1.931 -61.385,-2.238 -60.837,-2.238 -60.11,-1.512 -58.904,-1.512 -58.371,-0.979 -55.314,-0.979 -54.914,-1.379 -53.837,-1.379 -53.566,-1.108 -18.758,-1.108 -18.611,-1.256 -18.077,-1.256 v1(-18,-1.179)
  Bottom Layer w0.2: v1(-61.8,-1.931) v1@-61.692,-1.931
NetR14_1: R14.1 U2.5 | length 3.1
  Bottom Layer w0.2: R14.1 -14.127,-3.85 -13.869,-4.108 U2.5
NetR14_2: R14.2 R18.1 TP19.0 U6.4 | length 68.6
  Top Layer w0.2: U6.4 -73.592,-2.771 cw(c-71.3,-2.771) -71.3,-0.479 v1(-61.2,-0.479) ; TP19.0@-18,-0.377 -17.972,-0.406 -17.511,-0.406 -17.408,-0.508 v1(-17.3,-0.508) -16.587,-0.508 -16.312,-0.783 -15.875,-0.783 R18.1
  VCC w0.2: v1(-61.2,-0.479) -60.6,-0.479 -60.1,-0.979 -59.071,-0.979 -58.671,-0.579 -55.149,-0.579 -54.749,-0.979 -54.002,-0.979 -53.731,-0.708 -18.458,-0.708 -18.258,-0.508 v1(-17.3,-0.508)
  Bottom Layer w0.2: v1(-17.3,-0.508) -17.223,-0.431 -16.709,-0.431 -16.693,-0.416 -16.286,-0.416 -14.642,-2.059 R14.2
NetR15_2: R15.2 U2.4 U3.10 | length 7
  Top Layer w0.2: R15.2 -13.475,-4.579 -12.625,-5.429 v1(-12.559,-5.429) ; R15.2@-13.178,-4.579 -10.759,-4.579 -10.43,-4.908 -9.85,-4.908 -9.563,-4.622 -9.563,-4.171 U3.10
  Bottom Layer w0.2: v1(-12.559,-5.429) -12.486,-5.356 -11.966,-5.356 -11.849,-5.238 U2.4
NetR16_2: R16.2 R17.2 U3.24 | length 14.6
  Top Layer w0.2: R17.2 -14,-2.208 v1(-13.2,-2.208) -13.2,-2.604 -13.37,-2.773 -13.37,-3.099 R16.2 ; v1(-5.9,1.092) -5.9,0.165 U3.24@-5.877,0.142
  VCC w0.2: v1(-13.2,-2.208) -14.2,-1.208 -14.2,0.248 -13.922,0.526 -11.83,0.526 -11.265,1.092 v1(-5.9,1.092)
NetR18_2: R18.2 R19.2 U3.23 | length 13
  Top Layer w0.2: R18.2 R19.2 ; R19.2@-14.55,0.125 R19.2 ; v1(-13.556,-0.074) -14.355,-0.074 R19.2 ; U3.23 -5.145,-0.358 -5.025,-0.238 -5.025,0.64 -5.1,0.715 -5.023,0.792 v1(-5,0.792)
  VCC w0.2: v1(-13.556,-0.074) -11.666,-0.074 -11.1,0.492 -5.317,0.492 -5.017,0.792 v1(-5,0.792)
NetTP28_0: U3.12
NetTP31_0: U3.13
NetTP32_0: U3.26
NetTP33_0: U3.27
NetTP34_0: U3.5 Y1.3 | length 6.4
  Top Layer w0.2: v1(-12.6,-1.008) -12.6,-1.057 -11.799,-1.858 U3.5
  Bottom Layer w0.2: v1(-12.6,-1.008) -12.6,-0.959 -12.049,-0.408 -10.177,-0.408 -9.925,-0.156 -9.925,1.026 Y1.3
NetTP35_0: U3.6 Y1.1 | length 5.8
  Top Layer w0.2: v1(-13.408,-1.008) -13.408,-1.048 -12.449,-2.008 -12.316,-2.008 -11.966,-2.358 U3.6
  Bottom Layer w0.2: v1(-13.408,-1.008) -13.408,-0.968 -12.849,-0.408 -12.619,-0.408 -12.366,-0.155 -12.366,0.985 Y1.1
RED: D1.A P1.1 TP1.0 | length 4.1
  Top Layer w0.2: TP1.0 -15.9,-10.749 -15.801,-10.848
  Top Layer w0.5: P1.1@-17.132,-12.179 -15.801,-10.848 -15.207,-10.848 D1.A@-14.581,-10.222
pads on no net: FD1.0 FD2.0 FD3.0 FD4.0 FD5.0 J1.6 J1.7 J1.8 J1.9 U1.0@-10.908,-9.14 U1.0@-11.321,-8.726 U1.0@-11.474,-9.705 U1.0@-11.734,-8.313 U1.0@-11.887,-9.292 U1.0@-12.3,-8.879 U1.0@-12.039,-10.271 U1.0@-12.453,-9.858 U1.0@-12.866,-9.445 U3.0@-7.1,-0.408 U3.0@-7.1,-1.608 U3.0@-7.1,-2.808 U3.0@-8.3,-0.408 U3.0@-8.3,-1.608 U3.0@-8.3,-2.808 U3.0@-9.5,-0.408 U3.0@-9.5,-1.608 U3.0@-9.5,-2.808 U3.1 U3.2 U3.7 U3.8 U3.9 U3.11 U3.14 U3.16 U3.19 U3.22 U3.28 U3.29 U6.3

## Polygon pours and split planes (outlines as drawn)
BLACK on GND "GND" (solid, remove dead copper, pour order 2): -18.371,-10.637 -13.739,-13.044 -14.3,-14.408 -11.47,-15.978 -8.789,-17.08 -3.103,-13.446 -6.092,-8.908 -5.7,-7.408 -3.7,-2.009 -3.103,-1.613 -3.103,3.033 -6.092,6.021 -15.913,6.021 -18.371,0.492 -21.18,0.229 -62.2,0.229 -62.2,-4.043 -56.1,-4.155 -51.6,-5.808 -47.9,-5.618 -47.3,-2.617 -46.3,-1.739 -40.33,-1.739 -18.9,-1.739 -17.9,-2.408
BLACK on GND "GND" (solid, pour order 0): -18.082,-12.973
3V3 on VCC "GND" (solid, remove dead copper, pour order 4): -18.755,-6.909 -17.298,-8.365 -15.842,-6.909 -5.82,-6.909 -4.292,-3.454 -2.861,-1.523 -0.302,-1.523 -0.302,0.394 -1.3,1.392 -0.601,6.254 -7.985,6.792 -19.3,0.229 -62.2,0.229 -62.2,-7.379 -20.52,-6.928

## Keep-outs
Keep-Out Layer:
  lines w0.2: -62.929,-4.618 -62.929,0.688 ; -62.929,-4.618 -61.132,-4.618 ccw(c-61.132,-3.051) -60.02,-4.155 -58.594,-2.72 cw(c-57.482,-3.825) -57.482,-2.258 -53.252,-2.258 cw(c-53.259,-2.649) -52.96,-2.396 -52.773,-2.617 cw(c-55.886,-4.997) -52.291,-3.438 -52.032,-4.036 ccw(c-49.869,-3.192) -47.706,-4.036 -47.447,-3.438 cw(c-43.852,-4.997) -46.965,-2.617 -46.778,-2.396 cw(c-46.479,-2.649) -46.486,-2.258 -20.753,-2.258 -18.838,-2.258 cw(c-20.828,-6.971) -19.693,-11.959 -19.693,-12.259 -10.168,-17.28 -8.349,-12.63 cw(c-6.89,-13.201) -7.985,-12.081 -6.668,-10.792 ccw(c-7.764,-9.672) -6.306,-10.248 -3.457,-3.033 -3.103,-2.408 -2.283,-1.739 4.327,-1.739 4.327,1.724 -3.787,1.724 cw(c-3.787,3.182) -5.048,2.451 -5.862,4.15 cw(c-5.508,4.319) -5.877,4.187 ccw(c-7.684,3.538) -9.016,4.921 cw(c-19.46,15.77) -19.452,0.711 -62.929,0.688 ; -62.929,-4.618 -69.142,-4.618 ccw(c-69.142,-5.618) -70.142,-5.618 -70.142,-9.527 cw(c-71.412,-9.527) -71.412,-10.797 -74.816,-10.797 cw(c-74.816,-9.527) -76.086,-9.527 -76.086,-1.008 -76.086,-0.582 cw(c-74.816,-0.582) -74.816,0.688 -62.929,0.688

## Other copper
Top Layer:
  text "v1.1" at 4,-1.008 h0.6 r90
GND:
  pour cut-out: -49.869,-1.819 cw(c-49.869,-3.187) -48.5,-3.187 -48.5,-3.249 cw(c-49.869,-3.249) -49.869,-4.618 cw(c-49.869,-3.19) -51.296,-3.19 -51.296,-3.179 cw(c-49.936,-3.179) -49.936,-1.819

## Silkscreen, mask and mechanical layers (free items; w line width, h text height)
Top Overlay:
  lines w0.15: -36.1,-1.473 -26,-1.473 -26,0.027 -36.1,0.027 -36.1,-1.473
  text "OE.02.12.19.T" at -35.7,-1.158 h0.8
Bottom Overlay:
  text "BLACK" at -15.7,-12.379 h0.3 r332
  text "RED" at -18.1,-12.63 h0.3 r332
  text "BLUE" at -13.6,-14.979 h0.3 r332
Top Solder:
  region: -71.5,-5.879 -71.5,-7.079 -70.8,-7.079 -70.8,-9.679 -75.6,-9.679 -75.6,-7.079 -74.2,-7.079 -74.2,-5.879
Mechanical 2:
  circle w0.2: c2.226,-0.008 r0.9
  circle w0.2: c-49.869,-3.192 r0.9
  lines w0.2: -62.929,-4.618 -61.132,-4.618 ccw(c-61.132,-3.051) -60.02,-4.155 -58.594,-2.72 cw(c-57.482,-3.825) -57.482,-2.258 -53.252,-2.258 cw(c-53.259,-2.649) -52.96,-2.396 -52.773,-2.617 cw(c-55.886,-4.997) -52.291,-3.438 -52.032,-4.036 ccw(c-49.869,-3.192) -47.706,-4.036 -47.447,-3.438 cw(c-43.852,-4.997) -46.965,-2.617 -46.778,-2.396 cw(c-46.479,-2.649) -46.486,-2.258 -20.753,-2.258 -18.838,-2.258 cw(c-20.828,-6.971) -19.693,-11.959 -19.693,-12.259 -10.168,-17.28 -8.349,-12.63 cw(c-6.89,-13.201) -7.985,-12.081 -6.668,-10.792 ccw(c-7.764,-9.672) -6.306,-10.248 -3.457,-3.033 -3.103,-2.408 -2.283,-1.739 4.327,-1.739 4.327,1.724 -3.787,1.724 cw(c-3.787,3.182) -5.048,2.451 -5.862,4.15 cw(c-5.508,4.319) -5.877,4.187 ccw(c-7.684,3.538) -9.016,4.921 cw(c-19.46,15.77) -19.452,0.711 -62.929,0.688 ; -62.929,-4.618 -69.142,-4.618 ccw(c-69.142,-5.618) -70.142,-5.618 -70.142,-8.65 -70.142,-9.527 cw(c-71.412,-9.527) -71.412,-10.797 -72.289,-10.797 -74.227,-10.797 -74.816,-10.797 cw(c-74.816,-9.527) -76.086,-9.527 -76.086,-8.938 -76.086,-2.294 -76.086,-0.582 cw(c-74.816,-0.582) -74.816,0.688 -73.104,0.688 -62.929,0.688 ; -62.929,-4.618 -62.929,0.688
  text "RIGID" at -13.2,-1.708 h1.52
  text "FLEX" at -73.1,-2.396 h1.52
Route Tool Path:
  lines w0.2: -63.1,-6.079 cw(c-62.9,-6.079) -62.9,-5.879 ; -62.8,0.792 -73.8,0.792 -74.852,0.792 ccw(c-74.852,-0.556) -76.2,-0.556 -76.2,-1.608 -76.2,-9.208 -76.2,-9.479 ccw(c-74.771,-9.479) -74.771,-10.908 -74.5,-10.908 -72.3,-10.908 -71.366,-10.908 ccw(c-71.366,-9.542) -70,-9.542 -70,-8.608 -70,-5.508 -70,-5.408 -69.9,-5.208 -69.8,-5.008 -69.7,-4.908 -69.5,-4.808 -69.4,-4.779 -69.2,-4.708 -62.7,-4.708
  lines w2.5: -62.9,-5.879 -61.27,-5.879 ccw(c-61.27,-2.813) -59.102,-4.981 -57.9,-3.808 -58.164,-4.044 ; -62.5,1.892 -58.6,1.921 ; -54.3,-3.579 -53.7,-3.579 -53.4,-3.879 ; -54.2,1.921 -43.3,1.921 ; -53.3,-4.155 -53.1,-4.779 -52.8,-5.279 -52.291,-5.879 -52,-6.079 -51.7,-6.279 -51.3,-6.479 -51.1,-6.579 -50.8,-6.679 -50.4,-6.779 -49.869,-6.779 -49.1,-6.779 -48,-6.304 -47.4,-5.879 -46.9,-5.279 -46.3,-4.079 -46,-3.472 -45.8,-3.472 -41,-3.472 ; -37.7,1.921 -35.9,1.921 -26.7,1.921 ; -35.5,-3.479 -24.4,-3.472 ; -21.2,1.93 -19.4,1.93 -19,1.93 -17.243,2.121 -16.3,2.321 -15.3,2.621 -14.4,2.921 -13.3,3.421 -12,4.121 -11.3,4.621 -10.1,5.621 -9.3,6.321 -8.5,6.621 -7.3,6.721 -6.3,6.421 -5.4,5.821 -5.5,5.821 -5.3,5.621 -5.1,5.321 -4.5,4.121 -4,3.121 -3.9,3.021 -3.7,2.921 -1.5,2.921 ; -19.1,-3.579 -19,-3.579 -18.5,-3.879 -18.1,-4.279 -17.8,-4.579 -17.4,-5.179 -17.3,-5.429 -17,-6.379 -17,-7.179 -17,-7.379 -17,-7.579 -17.1,-7.979 -17.243,-8.379 -17.4,-8.779 -17.8,-9.379 -18.3,-9.879 -18.8,-10.279 -19.9,-10.779 -20.3,-10.779 -20.8,-11.279 -21,-11.779 -21,-12.081 -21,-12.379 -20.9,-12.679 -20.7,-13.179 -19.9,-13.579 -16.143,-15.579 ; -11.38,-18.039 -9.66,-18.899 ; -9.6,-18.779 -9.1,-17.779 -8.7,-16.979 -7.7,-14.279 -7.5,-13.779 -7.2,-13.079 -6.8,-12.679 -6.2,-12.079 -5.6,-11.479 -5.2,-10.879 -5.1,-10.479 -4.6,-9.379 -4.349,-8.698 ; -2.378,-3.587 -2.3,-3.379 -1.9,-2.979 -0.6,-2.979 5.6,-2.979 5.6,2.921 ; 4,2.944 5.6,2.944

## Text inside footprints (layer, text, board x,y; h text height)
D1: Top Overlay "K" at -13.446,-12.814 h0.6 r315